# EAGLE board ldr (EAGLE 5.11)
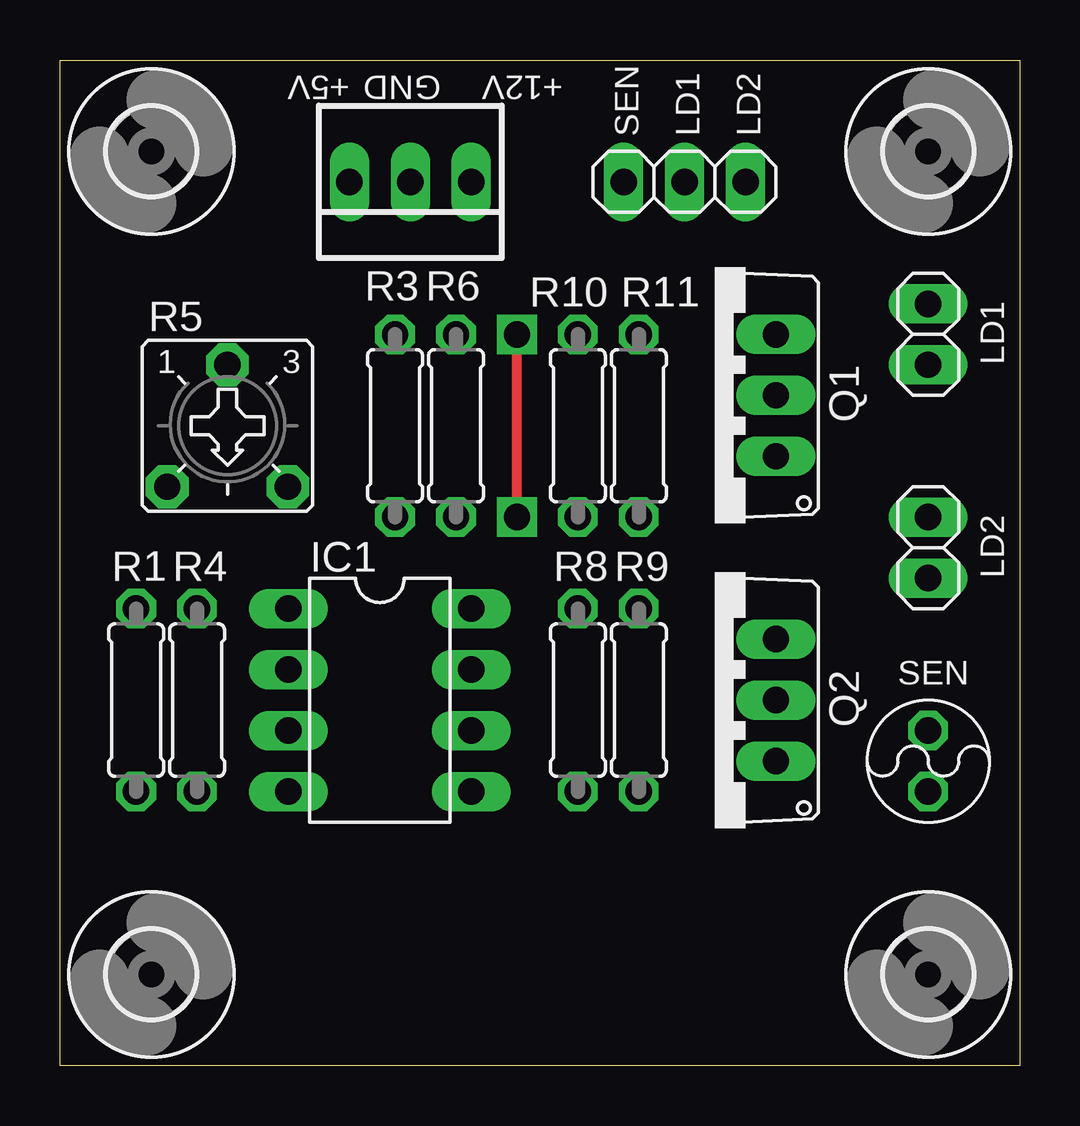
[diagram p0: board, top side]
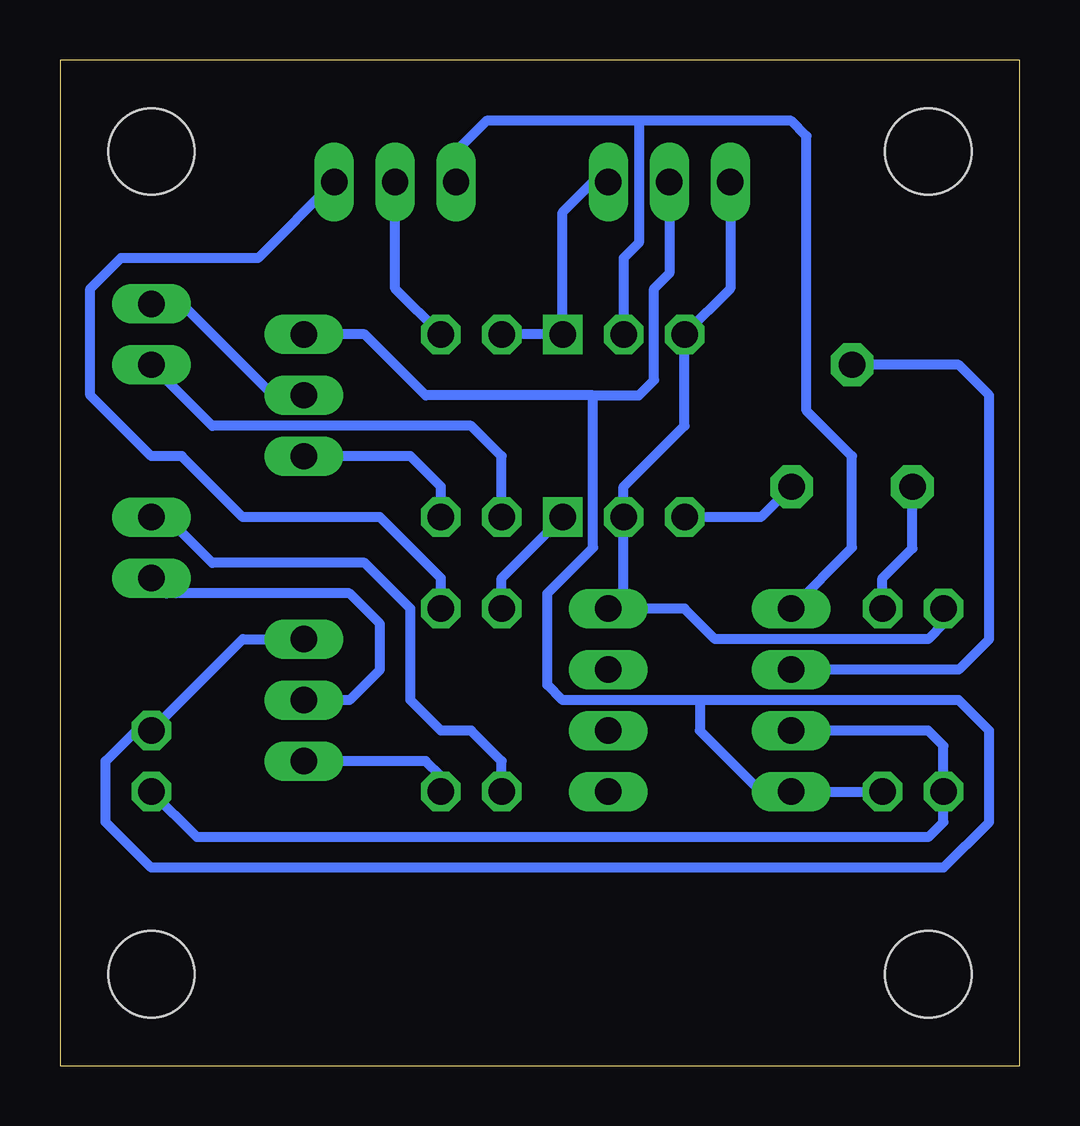
[diagram p1: board, bottom side, seen from below]

Size 40.01 x 41.91 mm. Coordinates in mm from the lower left corner, seen from the top.
Outline: 0,0 0,41.91 40.01,41.91 40.01,0 0,0
Copper layers (1*16): Top 0.035mm / dielectric 1.5mm / Bottom 0.035mm
Design rules "default": minimum track width 10mil, minimum drill 24mil, track to track 8mil, track to pad 8mil, pad to pad 8mil, via to via 8mil, smd to smd 8mil, copper to edge 40mil, drill to drill 8mil, minimum pad ring 10mil, minimum via ring 8mil, stop-mask expansion 4mil, vias tented up to drill 0mil, thermal gap 10mil

## Footprints (pad centres in the part's own frame; a part is rotated, then mirrored left to right if it is on the bottom)
DIL08 = drill 1.1 long: 1 -3.81,-3.81; 2 -1.27,-3.81; 3 1.27,-3.81; 4 3.81,-3.81; 5 3.81,3.81; 6 1.27,3.81; 7 -1.27,3.81; 8 -3.81,3.81
1X02 = drill 1.1 long: 1 -1.27,0; 2 1.27,0
1X03 = drill 1.1 long: 1 -2.54,0; 2 0,0; 3 2.54,0
TO220AV = drill 1.1 long: B -2.54,-2.54; C 0,-2.54; E 2.54,-2.54
0207/7 = drill 1.1 octagon: 1 -3.81,0; 2 3.81,0
LDR-5MM = drill 1.1 octagon: 1 -1.27,0; 2 1.27,0
CT6 = drill 1.1 pad 1.778 octagon: A 2.515,2.54; E -2.515,2.54; S 0,-2.54
3,6 = hole 3.6: 0,0
22-23-2031 = drill 1.1 long: 1 -2.54,0; 2 0,0; 3 2.54,0

## Placement (x,y rotation side)
IC1  LM393N  [DIL08]  13.34,15.24 270 top
JP1  [1X02]  36.2,30.48 90 top
JP2  [1X02]  36.2,21.59 270 top
JP3  [1X03]  26.04,36.83 0 top
Q1  TIP112  [TO220AV]  27.3,27.94 90 top
Q2  TIP112  [TO220AV]  27.3,15.24 90 top
R1  10K  [0207/7]  3.17,15.24 90 top
R2  [LDR-5MM]  36.2,12.7 90 top
R3  470  [0207/7]  13.97,26.67 90 top
R4  470  [0207/7]  5.71,15.24 90 top
R5  10K  [CT6]  6.99,26.67 180 top
R6  1K  [0207/7]  16.51,26.67 270 top
R8  1K  [0207/7]  21.59,15.24 90 top
R9  10k  [0207/7]  24.13,15.24 90 top
R10  1K  [0207/7]  21.59,26.67 90 top
R11  10k  [0207/7]  24.13,26.67 90 top
U$1  [3,6]  3.81,3.81 0 top
U$2  [3,6]  3.81,38.1 0 top
U$3  [3,6]  36.2,38.1 0 top
U$4  [3,6]  36.2,3.81 0 top
X1  22-23-2031  [22-23-2031]  14.61,36.83 180 top

## Library data of the parts
IC1 JP1-JP3 Q1 Q2 R1-R6 R8-R11 U$1-U$4 X1 = caixa

## Nets
+5V: IC1.8 R1.2 R3.2 R6.2 X1.3
+12V: R8.2 R10.2 X1.1
GND: IC1.4 Q1.E Q2.E R2.2 R4.1 X1.2
LDR_LED1: JP3.2 R11.2
LDR_LED2: JP3.3 R9.2
LDR_SENSOR: IC1.1 JP3.1 R6.1
N$1: IC1.3 R1.1 R2.1
N$2: R3.1 R5.E
N$3: R4.2 R5.A
N$4: IC1.2 R5.S
N$5: JP2.1 R8.1
N$6: JP2.2 Q2.C
N$8: Q2.B R9.1
N$9: JP1.1 R10.1
N$10: JP1.2 Q1.C
N$11: Q1.B R11.1

## Tracks (layer width: path | path; a pad name or v marks a point on that pad's centre or on a via)
+5V
  Bottom 0.406: R1.2 3.17,18.41 3.81,17.78 12.7,17.78 13.97,19.05 IC1.8 16.51,19.68 R6.2 16.51,24.13 13.97,26.67 R3.2 12.06,32.38 X1.3
+12V  (via drill 1.1)
  Top 0.406: v19.05,22.86 v19.05,30.48
  Bottom 0.406: R8.2 21.59,20.32 v19.05,22.86 | R10.2 v19.05,30.48 19.05,35.56 17.78,36.83 X1.1
GND
  Bottom 0.406: Q1.E 27.3,30.48 24.77,27.94 17.78,27.94 | R4.1 IC1.4 10.79,11.43 13.34,13.97 13.34,15.24 | 13.34,15.24 2.54,15.24 1.27,13.97 1.27,10.16 3.17,8.26 36.2,8.26 38.1,10.16 38.1,12.7 36.83,13.97 R2.2 32.38,17.78 Q2.E | 13.34,15.24 19.05,15.24 19.68,15.88 19.68,19.68 17.78,21.59 17.78,27.94 | 17.78,27.94 15.88,27.94 15.24,28.57 15.24,32.38 14.61,33.02 X1.2
LDR_LED1
  Bottom 0.406: R11.2 26.04,32.38 JP3.2
LDR_LED2
  Bottom 0.406: R9.2 24.13,20.32 26.67,22.86 32.38,22.86 34.92,25.4 36.2,25.4 38.73,27.94 38.73,32.38 37.47,33.66 31.75,33.66 JP3.3
LDR_SENSOR
  Bottom 0.406: 15.88,39.37 9.53,39.37 8.89,38.73 8.89,27.3 6.99,25.4 6.99,21.59 IC1.1 | R6.1 16.51,33.66 15.88,34.29 15.88,39.37 | 15.88,39.37 22.23,39.37 23.5,38.1 JP3.1
N$1
  Bottom 0.406: R2.1 34.29,9.53 3.81,9.53 3.17,10.16 R1.1 3.17,13.34 3.81,13.97 IC1.3
N$2
  Bottom 0.406: R5.E 9.53,24.13 10.79,22.86 R3.1
N$3
  Bottom 0.406: R5.A 4.47,21.57 5.71,20.32 R4.2
N$4
  Bottom 0.406: IC1.2 2.54,16.51 1.27,17.78 1.27,27.94 2.54,29.21 R5.S
N$5
  Bottom 0.406: JP2.1 35.56,22.86 33.66,20.95 27.3,20.95 25.4,19.05 25.4,15.24 24.13,13.97 22.86,13.97 21.59,12.7 R8.1
N$6
  Bottom 0.406: Q2.C 27.94,15.24 26.67,16.51 26.67,18.41 27.94,19.68 35.56,19.68 JP2.2
N$8
  Bottom 0.406: R9.1 24.13,12.06 24.77,12.7 Q2.B
N$9
  Bottom 0.406: R10.1 21.59,25.4 22.86,26.67 33.66,26.67 JP1.1
N$10
  Bottom 0.406: Q1.C 31.11,27.94 34.92,31.75 JP1.2
N$11
  Bottom 0.406: R11.1 24.13,24.13 25.4,25.4 Q1.B

## Text on the board
tNames: +5V | GND | +12V | SEN | LD1 | LD2 | LD1 | LD2 | SEN